# EAGLE board InkTime_2D-PCB (EAGLE 9.7.0)
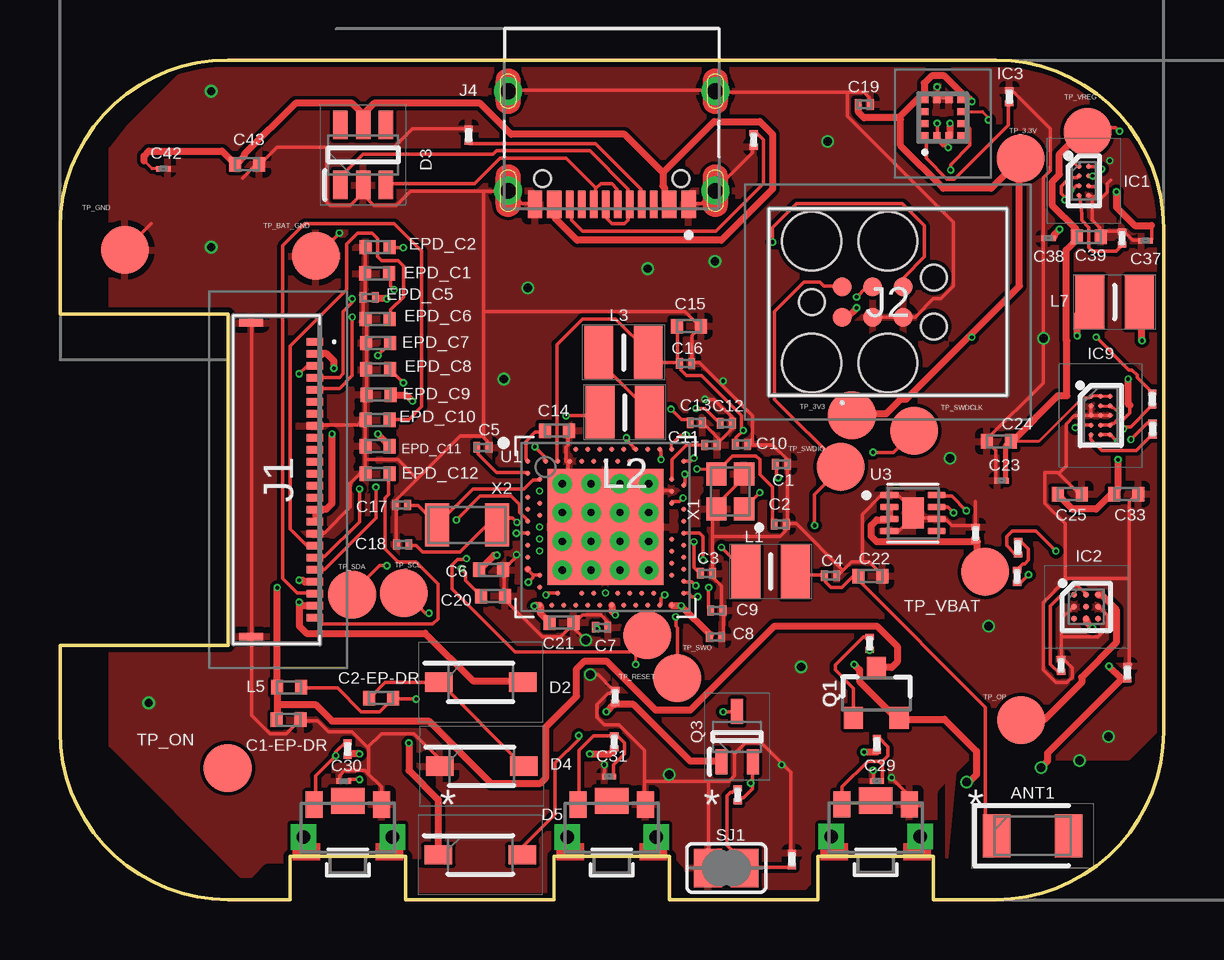
[diagram p0: board, top side]
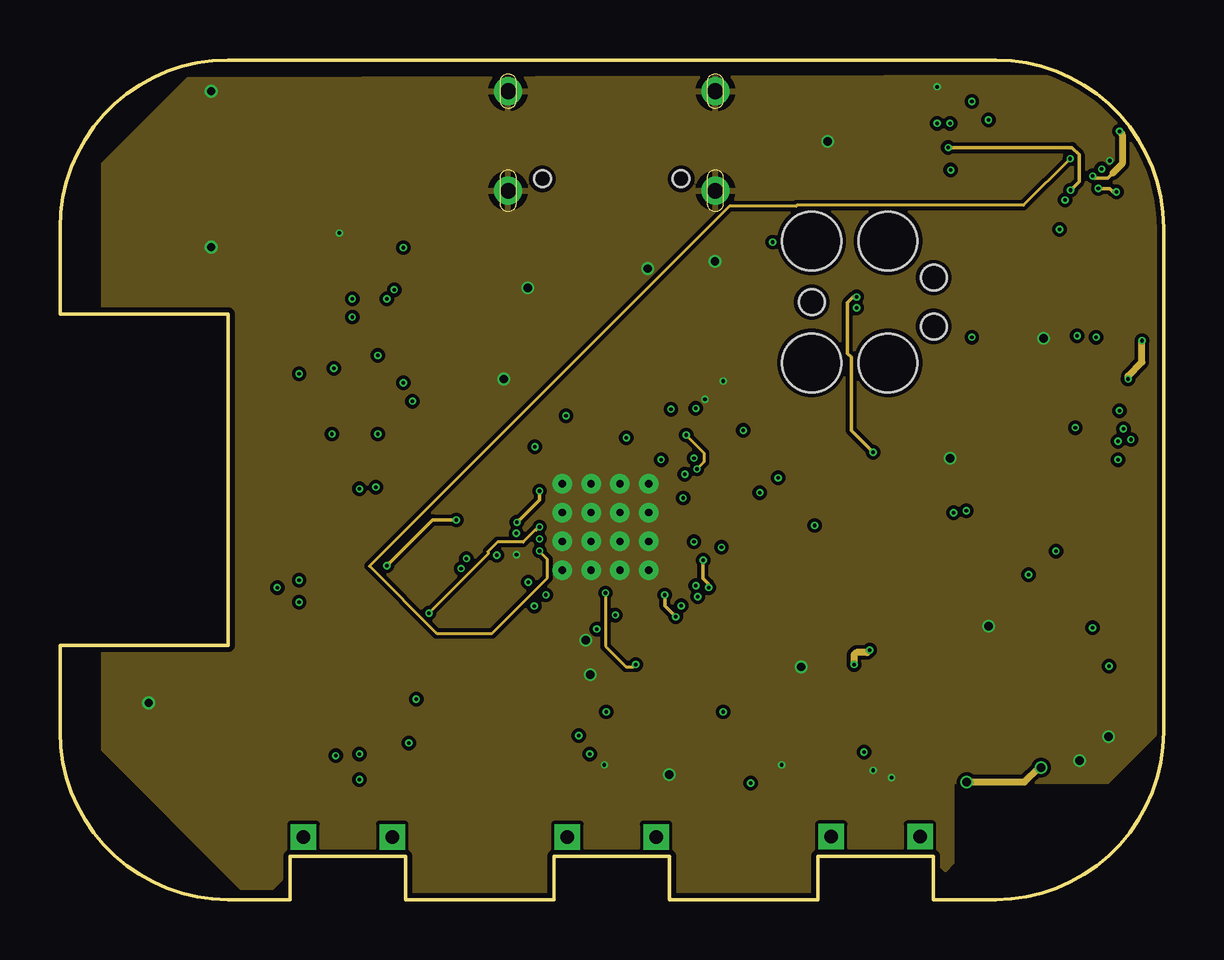
[diagram p1: board, inner layer Route2]
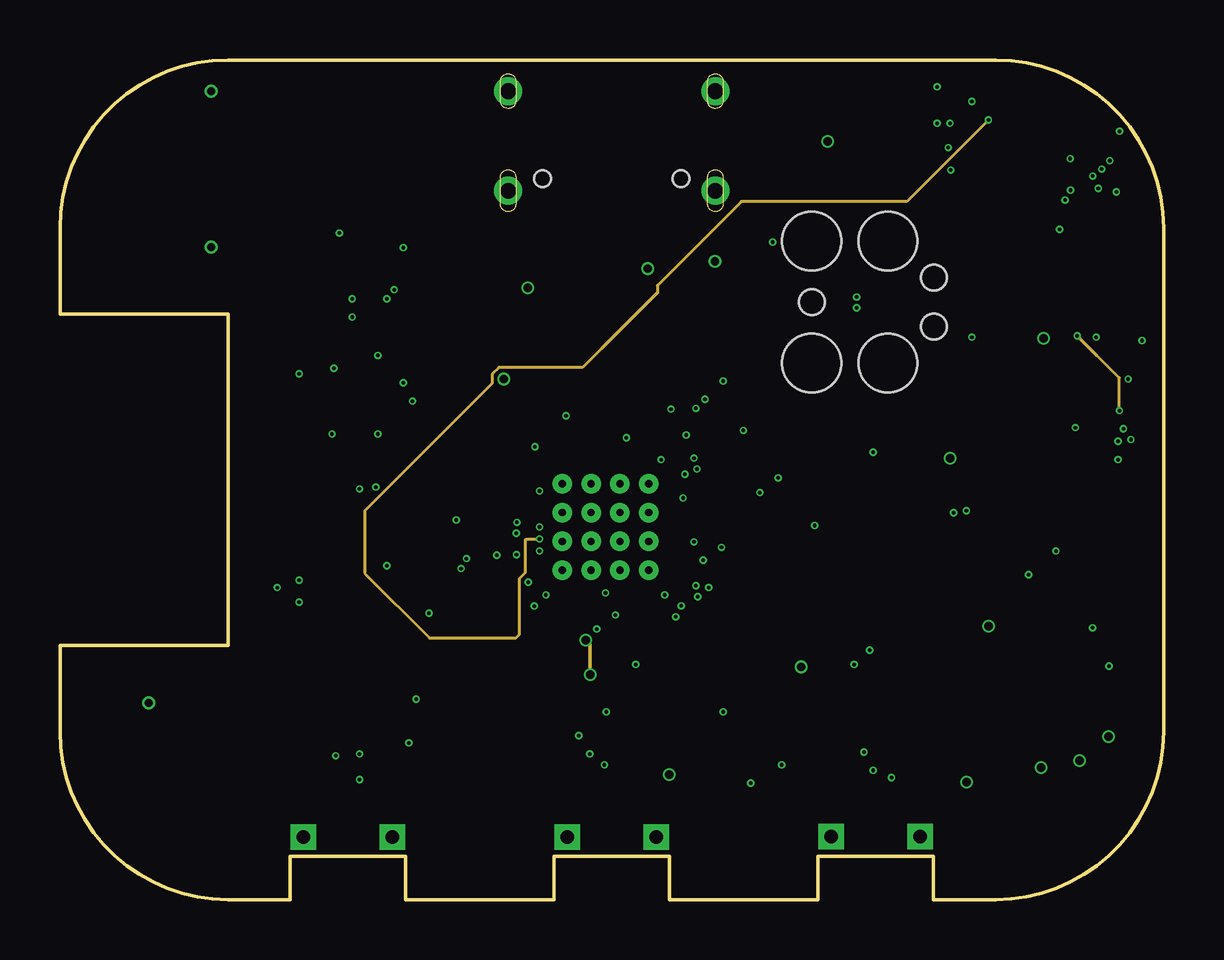
[diagram p2: board, inner layer Route15]
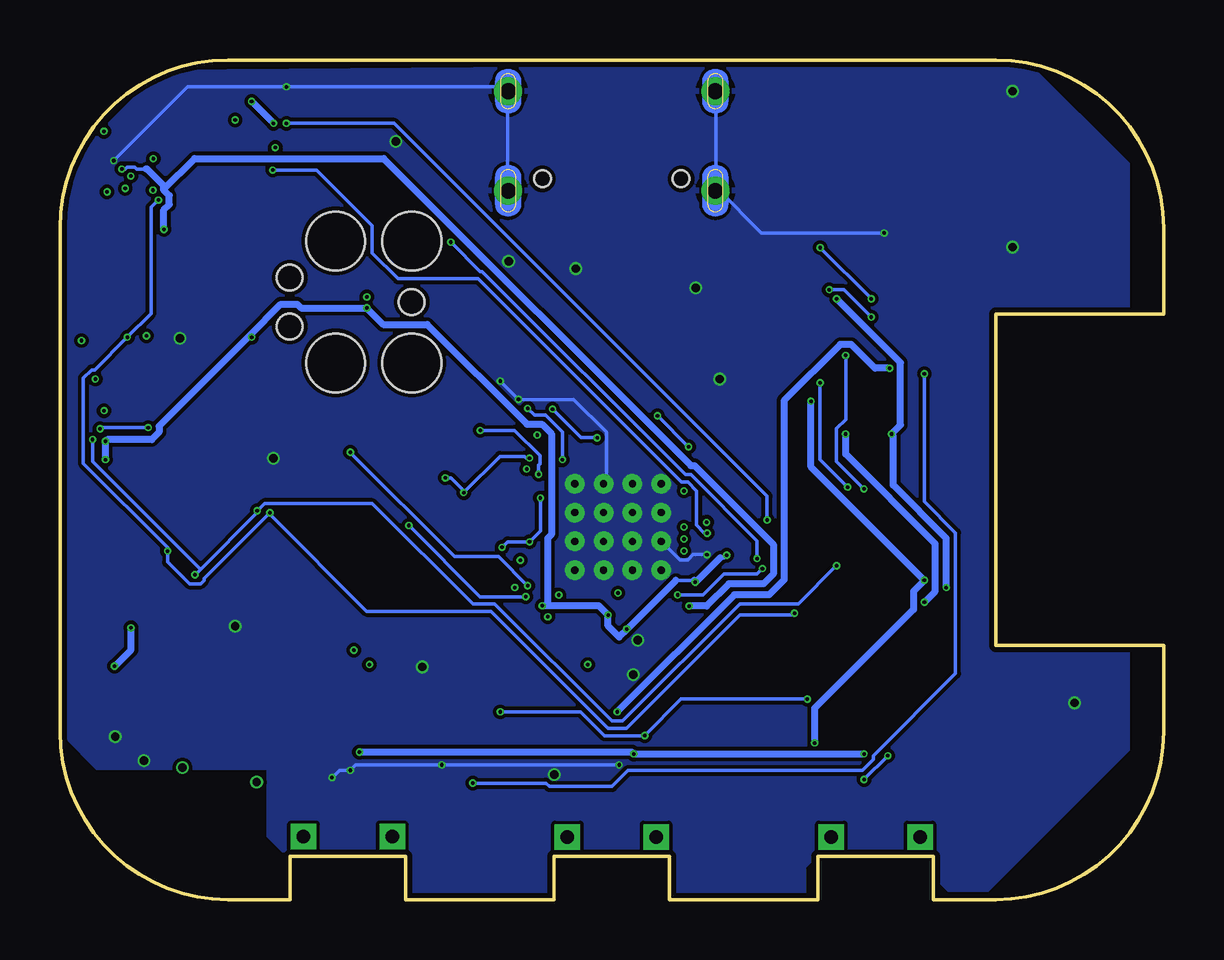
[diagram p3: board, bottom side, seen from below]

Size 46 x 35 mm. Coordinates in mm from the lower left corner, seen from the top.
Outline: 39,35 arc-90 46,28 46,7 arc-90 39,0 36.4,0 36.4,1.8 31.6,1.8 31.6,0 25.4,0 25.4,1.8 20.6,1.8 20.6,0 14.4,0 14.4,1.8 9.6,1.8 9.6,0 7,0 arc-90 0,7 0,10.6 7,10.6 7,24.4 0,24.4 0,28 arc-90 7,35 39,35
Copper layers (1+2*15+16): Top 0.035mm / dielectric 1.5mm / Route2 0.035mm / dielectric 0.15mm / Route15 0.035mm / dielectric 0.2mm / Bottom 0.035mm
Design rules "Fusion Electronics Design Rules *": minimum track width 0.13mm, minimum drill 0.15mm, track to track 0.15mm, track to pad 0.15mm, pad to pad 0.15mm, via to via 0.15mm, smd to smd 0.15mm, copper to edge 0.2mm, drill to drill 6mil, minimum pad ring 10mil, minimum via ring 0.075mm, stop-mask expansion 4mil, vias tented up to drill 9999mil, thermal gap 10mil

## Footprints (pad centres in the part's own frame; a part is rotated, then mirrored left to right if it is on the bottom)
2450AT18B100E_ANTC3216X140N = smd 1.15 x 1.8: 1 -1.5,0; 2 1.5,0
NORDIC_NRF_3_RESC0201_L = smd 0.28 x 0.43: 1 -0.255,0; 2 0.255,0
NORDIC_NRF_3_RESC0402_L = smd 0.5 x 0.6: 1 -0.5,0; 2 0.5,0
GRM011R60J152KE01L_2_CAPC0201X13N = smd 0.22 x 0.23: 1 -0.185,0; 2 0.185,0
GRM011R60J152KE01L_1_0201 = smd 0.35 x 0.25: 1 0,0.275; 2 0,-0.275
ESP32_C6_LIBRARY_5_SOD3716X135N = smd 1.15 x 0.8: 1 -1.75,0; 2 1.75,0
ESP32_C6_LIBRARY_3_SOT95P280X145-6N = smd 1.2 x 0.6: 1 -1.25,0.95; 2 -1.25,0; 3 -1.25,-0.95; 4 1.25,-0.95; 5 1.25,0; 6 1.25,0.95
BQ25180YBGR_BGA8C40P2X4_100X155X50 = smd 0.2 x 0.2: A1 -0.2,0.6; A2 0.2,0.6; B1 -0.2,0.2; B2 0.2,0.2; C1 -0.2,-0.2; C2 0.2,-0.2; D1 -0.2,-0.6; D2 0.2,-0.6
DRV2605YZFR_BGA9C50P3X3_144X144X62 = smd 0.25 x 0.25: A1 -0.5,0.5; A2 0,0.5; A3 0.5,0.5; B1 -0.5,0; B2 0,0; B3 0.5,0; C1 -0.5,-0.5; C2 0,-0.5; C3 0.5,-0.5
BMA423_BMA423 = smd 0.3 x 0.35: 1 -0.75,-0.775; 2 -0.25,-0.775; 3 0.25,-0.775; 4 0.75,-0.775; 7 0.75,0.775; 8 0.25,0.775; 9 -0.25,0.775; 10 -0.75,0.775 | smd 0.35 x 0.3: 5 0.775,-0.25; 6 0.775,0.25; 11 -0.775,0.25; 12 -0.775,-0.25
RT6160AWSC_BGA15C40P3X5_140X230X60 = smd 0.216 x 0.216: A1 -0.4,0.8; A2 0,0.8; A3 0.4,0.8; B1 -0.4,0.4; B2 0,0.4; B3 0.4,0.4; C1 -0.4,0; C2 0,0; C3 0.4,0; D1 -0.4,-0.4; D2 0,-0.4; D3 0.4,-0.4; E1 -0.4,-0.8; E2 0,-0.8; E3 0.4,-0.8
503480-2400_5034802400 = smd 0.3 x 0.7: 1 -5.75,1.525; 2 -5.25,1.525; 3 -4.75,1.525; 4 -4.25,1.525; 5 -3.75,1.525; 6 -3.25,1.525; 7 -2.75,1.525; 8 -2.25,1.525; 9 -1.75,1.525; 10 -1.25,1.525; 11 -0.75,1.525; 12 -0.25,1.525; 13 0.25,1.525; 14 0.75,1.525; 15 1.25,1.525; 16 1.75,1.525; 17 2.25,1.525; 18 2.75,1.525; 19 3.25,1.525; 20 3.75,1.525; 21 4.25,1.525; 22 4.75,1.525; 23 5.25,1.525; 24 5.75,1.525 | smd 0.3 x 1: MP1 -6.54,-1.125; MP2 6.54,-1.125
TC2030-IDC_TC2030IDC = smd 0.783 x 0.783: 1 -0.953,-0.635; 2 -0.953,0.635; 3 0.317,-0.635; 4 0.317,0.635; 5 1.588,-0.635; 6 1.588,0.635 | hole 2.451: -2.223,-2.54; -2.223,2.54; 0.952,-2.54; 0.952,2.54 | hole 1.067: -2.223,0; 2.857,-1.016; 2.857,1.016
KH-TYPE-C-16P_KINGHELM_KH-TYPE-C-16P = smd 0.6 x 1.15: A1_B12 -3.2,4.725; A4_B9 -2.4,4.725; A9_B4 2.4,4.725; A12_B1 3.2,4.725 | smd 0.3 x 1.15: A5 -1.25,4.725; A6 -0.25,4.725; A7 0.25,4.725; A8 1.25,4.725; B5 1.75,4.725; B6 0.75,4.725; B7 -0.75,4.725; B8 -1.75,4.725 | drill 0.65 pad 1.05: SH1 -4.32,0; SH2 4.32,0; SH3 -4.32,4.15; SH4 4.32,4.15 | hole 0.7: -2.89,3.65; 2.89,3.65
MLP2016SR47MT0S1_INDC2016X100N = smd 1.2 x 2.2: 1 -1.028,0; 2 1.028,0
NORDIC_NRF_2_RESC0402_L = smd 0.5 x 0.6: 1 -0.5,0; 2 0.5,0
ESP32_C6_LIBRARY_4_ESP32_C6_LIBRARY_4_ESP32_C6_LIBRARY_4_ESP32_C6_LIBRARY_4_ESP32_WROVER_SPARKFUN-DISCRETESEMI_SOT23-3 = smd 0.8 x 0.9: 1 -0.95,-1; 2 0.95,-1; 3 0,1.1
ESP32_C6_LIBRARY_6_SOT65P210X110-3N = smd 1.05 x 0.5: 1 -1.05,0.65; 2 -1.05,-0.65; 3 1.05,0
CPF0201D7K68C1_0201 = smd 0.35 x 0.25: 1 0,0.275; 2 0,-0.275
ESP32_C6_LIBRARY_7_JUMPER_SJ = smd 1.168 x 1.6: 1 -0.762,0; 2 0.762,0
2025-10-22_07-23-44_LIBRARY_SW_EVP-AKE31A_PAN = smd 0.711 x 1.092: 1 -1.4,-0.972; 2 1.4,-0.972 | drill 0.559 pad 0.914 square: 3 -1.848,0.381; 4 1.848,0.381 | smd 1.397 x 1.092: 5 0,-1.124
HECTOR_WATCH_1_TP20R = smd 2 x 2: TP 0,0
NORDIC_NRF_4_AQFN50P700X700X85_HS-74N = smd 4.85 x 4.85: P$74 0,0 | drill 0.3 pad 0.6: P$75 -1.8,1.8; P$76 -0.6,1.8; P$77 0.6,1.8; P$78 1.8,1.8; P$79 -1.8,0.6; P$80 -0.6,0.6; P$81 0.6,0.6; P$82 1.8,0.6; P$83 -1.8,-0.6; P$84 -0.6,-0.6; P$85 0.6,-0.6; P$86 1.8,-0.6; P$87 -1.8,-1.8; P$88 -0.6,-1.8; P$89 0.6,-1.8; P$90 1.8,-1.8 | smd 0.2 x 0.2: P$A8 -1.25,3.25; P$A10 -0.75,3.25; P$A12 -0.25,3.25; P$A14 0.25,3.25; P$A16 0.75,3.25; P$A18 1.25,3.25; P$A20 1.75,3.25; P$A22 2.25,3.25; P$A23 2.75,3.25; P$AA24 3.25,-2.25; P$AB2 -2.75,-2.5; P$AC5 -2,-2.75; P$AC9 -1,-2.75; P$AC11 -0.5,-2.75; P$AC13 0,-2.75; P$AC15 0.5,-2.75; P$AC17 1,-2.75; P$AC19 1.5,-2.75; P$AC21 2,-2.75; P$AC24 3.25,-2.75; P$AD2 -2.75,-3.25; P$AD4 -2.25,-3.25; P$AD6 -1.75,-3.25; P$AD8 -1.25,-3.25; P$AD10 -0.75,-3.25; P$AD12 -0.25,-3.25; P$AD14 0.25,-3.25; P$AD16 0.75,-3.25; P$AD18 1.25,-3.25; P$AD20 1.75,-3.25; P$AD22 2.25,-3.25; P$AD23 2.75,-3.25; P$B1 -3.25,2.75; P$B3 -2.5,2.75; P$B5 -2,2.75; P$B7 -1.5,2.75; P$B9 -1,2.75; P$B11 -0.5,2.75; P$B13 0,2.75; P$B15 0.5,2.75; P$B17 1,2.75; P$B19 1.5,2.75; P$B24 3.25,2.75; P$C1 -3.25,2.25; P$D2 -2.75,2; P$D23 2.75,2; P$E24 3.25,1.75; P$F2 -2.75,1.5; P$F23 2.75,1.5; P$G1 -3.25,1.25; P$H2 -2.75,1; P$H23 2.75,1; P$J1 -3.25,0.75; P$J24 3.25,0.75; P$K2 -2.75,0.5; P$L1 -3.25,0.25; P$L24 3.25,0.25; P$M2 -2.75,0; P$N1 -3.25,-0.25; P$N24 3.25,-0.25; P$P2 -2.75,-0.5; P$P23 2.75,-0.5; P$R1 -3.25,-0.75; P$R24 3.25,-0.75; P$T2 -2.75,-1; P$T23 2.75,-1; P$U1 -3.25,-1.25; P$U24 3.25,-1.25; P$V23 2.75,-1.5; P$W1 -3.25,-1.75; P$W24 3.25,-1.75; P$Y2 -2.75,-2; P$Y23 2.75,-2
ESP32_C6_LIBRARY_SON50P200X200X80-9N = smd 0.76 x 0.27: 1 -0.985,0.75; 2 -0.985,0.25; 3 -0.985,-0.25; 4 -0.985,-0.75; 5 0.985,-0.75; 6 0.985,-0.25; 7 0.985,0.25; 8 0.985,0.75 | smd 0.9 x 1.3: 9 0,0
NORDIC_NRF_BT-XTAL_2016_N = smd 0.95 x 0.85: 1 -0.725,-0.575; 2 0.725,-0.575; 3 0.725,0.575; 4 -0.725,0.575
NORDIC_NRF_1_XTAL_3215_N = smd 1 x 1.8: 1 -1.25,0; 2 1.25,0

## Placement (x,y rotation side)
ANT1  2450AT18B100E  [2450AT18B100E_ANTC3216X140N]  40.54,2.66 0 top
C1  12pF  [NORDIC_NRF_3_RESC0201_L]  30.08,18.15 0 top
C1-EP-DR  10uF  [NORDIC_NRF_3_RESC0402_L]  9.54,7.5 0 top
C2  12pF  [NORDIC_NRF_3_RESC0201_L]  30.03,15.65 0 top
C2-EP-DR  4.7uF/25V  [NORDIC_NRF_3_RESC0402_L]  13.38,8.4 0 top
C3  1pF  [NORDIC_NRF_3_RESC0201_L]  26.95,13.6 0 top
C4  1pF  [NORDIC_NRF_3_RESC0201_L]  32.12,13.5 0 top
C5  100nF  [NORDIC_NRF_3_RESC0201_L]  17.63,18.85 0 top
C6  4.7uF  [NORDIC_NRF_3_RESC0402_L]  17.96,13.75 0 top
C7  100nF  [NORDIC_NRF_3_RESC0201_L]  22.58,11.35 0 top
C8  100nF  [NORDIC_NRF_3_RESC0201_L]  27.33,10.95 0 top
C9  820pF  [NORDIC_NRF_3_RESC0201_L]  27.38,12.05 0 top
C10  N.C  [NORDIC_NRF_3_RESC0201_L]  28.41,18.98 0 top
C11  100pF  [NORDIC_NRF_3_RESC0201_L]  27.13,18.95 0 top
C12  100nF  [NORDIC_NRF_3_RESC0201_L]  27.78,19.85 0 top
C13  N.C  [NORDIC_NRF_3_RESC0201_L]  26.53,19.88 0 top
C14  4.7uF  [NORDIC_NRF_3_RESC0402_L]  20.71,19.55 0 top
C15  1uF  [NORDIC_NRF_3_RESC0402_L]  26.21,23.9 0 top
C16  47nF  [NORDIC_NRF_3_RESC0201_L]  26.08,22.35 0 top
C17  12pF  [NORDIC_NRF_3_RESC0201_L]  14.23,16.45 0 top
C18  12pF  [NORDIC_NRF_3_RESC0201_L]  14.29,14.8 0 top
C19  100nF  [NORDIC_NRF_3_RESC0201_L]  33.53,33.15 0 top
C20  4.7uF  [NORDIC_NRF_3_RESC0402_L]  18.06,12.65 0 top
C21  4.7uF  [NORDIC_NRF_3_RESC0402_L]  20.91,11.55 0 top
C22  N.C  [NORDIC_NRF_3_RESC0402_L]  33.78,13.48 0 top
C23  0.1uF  [GRM011R60J152KE01L_2_CAPC0201X13N]  39.25,17.46 0 top
C24  10uF  [NORDIC_NRF_3_RESC0402_L]  39.14,19.1 0 top
C25  22uF  [NORDIC_NRF_3_RESC0402_L]  42.09,16.9 0 top
C27  0.1uF  [GRM011R60J152KE01L_1_0201]  38.17,15.26 0 top
C29  1uF  [GRM011R60J152KE01L_2_CAPC0201X13N]  34.06,4.94 0 top
C30  1uF  [GRM011R60J152KE01L_2_CAPC0201X13N]  11.83,4.93 0 top
C31  1uF  [GRM011R60J152KE01L_2_CAPC0201X13N]  22.89,5.13 0 top
C32  1uF  [GRM011R60J152KE01L_1_0201]  41.73,9.76 0 top
C33  22uF  [NORDIC_NRF_3_RESC0402_L]  44.44,16.9 0 top
C34  0.1uF  [GRM011R60J152KE01L_1_0201]  44.49,9.46 0 top
C37  1uF  [GRM011R60J152KE01L_2_CAPC0201X13N]  45.25,27.46 0 top
C38  1uF  [GRM011R60J152KE01L_2_CAPC0201X13N]  41.21,27.56 0 top
C39  10uF  [NORDIC_NRF_3_RESC0402_L]  42.89,27.62 0 top
C42  0.1uF  [GRM011R60J152KE01L_2_CAPC0201X13N]  4.31,30.46 0 top
C43  4.7uF\  [NORDIC_NRF_3_RESC0402_L]  7.81,30.65 0 top
D2  MBR0530  [ESP32_C6_LIBRARY_5_SOD3716X135N]  17.54,9.06 0 top
D3  USBLC6-2SC6Y  [ESP32_C6_LIBRARY_3_SOT95P280X145-6N]  12.64,31.04 90 top
D4  MBR0530  [ESP32_C6_LIBRARY_5_SOD3716X135N]  17.58,5.56 0 top
D5  MBR0530  [ESP32_C6_LIBRARY_5_SOD3716X135N]  17.52,1.86 0 top
EPD_C1  1uF/50V  [NORDIC_NRF_3_RESC0402_L]  13.22,26.1 0 top
EPD_C2  1uF/50V  [NORDIC_NRF_3_RESC0402_L]  13.23,27.2 0 top
EPD_C5  0.1uF/50V  [NORDIC_NRF_3_RESC0201_L]  12.89,25.1 0 top
EPD_C6  1uF/50V  [NORDIC_NRF_3_RESC0402_L]  13.24,24.2 0 top
EPD_C7  1uF/50V  [NORDIC_NRF_3_RESC0402_L]  13.25,23.2 0 top
EPD_C8  1uF/50V  [NORDIC_NRF_3_RESC0402_L]  13.26,22.1 0 top
EPD_C9  1uF/50V  [NORDIC_NRF_3_RESC0402_L]  13.28,21.05 0 top
EPD_C10  1uF/50V  [NORDIC_NRF_3_RESC0402_L]  13.23,20 0 top
EPD_C11  1uF/50V  [NORDIC_NRF_3_RESC0402_L]  13.23,18.9 0 top
EPD_C12  1uF/50V  [NORDIC_NRF_3_RESC0402_L]  13.23,17.75 0 top
IC1  BQ25180YBGR  [BQ25180YBGR_BGA8C40P2X4_100X155X50]  42.68,29.96 0 top
IC2  DRV2605YZFR  [DRV2605YZFR_BGA9C50P3X3_144X144X62]  42.78,12.2 0 top
IC3  BMA421  [BMA423_BMA423]  36.8,32.6 0 top
IC9  RT6160AWSC  [RT6160AWSC_BGA15C40P3X5_140X230X60]  43.38,20.18 0 top
J1  503480-2400  [503480-2400_5034802400]  9.1,17.5 270 top
J2  TC2030-IDC  [TC2030-IDC_TC2030IDC]  33.56,24.91 0 top
J4  KH-TYPE-C-16P  [KH-TYPE-C-16P_KINGHELM_KH-TYPE-C-16P]  23,33.7 180 top
L1  3.9nH  [MLP2016SR47MT0S1_INDC2016X100N]  29.62,13.68 0 top
L2  10uH  [MLP2016SR47MT0S1_INDC2016X100N]  23.54,20.31 0 top
L3  15nH  [MLP2016SR47MT0S1_INDC2016X100N]  23.49,22.81 0 top
L5  68uH  [NORDIC_NRF_2_RESC0402_L]  9.56,8.85 0 top
L7  FTC252012SR47MBCA  [MLP2016SR47MT0S1_INDC2016X100N]  43.96,24.91 0 top
Q1  20V/4.2A/52mΩ/1.4W  [ESP32_C6_LIBRARY_4_ESP32_C6_LIBRARY_4_ESP32_C6_LIBRARY_4_ESP32_C6_LIBRARY_4_ESP32_WROVER_SPARKFUN-DISCRETESEMI_SOT23-3]  34.03,8.57 0 top
Q3  SI1308EDL-T1-GE3  [ESP32_C6_LIBRARY_6_SOT65P210X110-3N]  28.23,6.79 90 top
R1_EP_DR  0.47  [CPF0201D7K68C1_0201]  28.25,4.36 0 top
R1_USB  5K1  [CPF0201D7K68C1_0201]  17.03,31.87 0 top
R2  0  [CPF0201D7K68C1_0201]  45.55,19.62 0 top
R2_EP_DR  10K  [CPF0201D7K68C1_0201]  23.15,8.47 0 top
R2_USB  5K1  [CPF0201D7K68C1_0201]  28.91,31.67 0 top
R3  0  [CPF0201D7K68C1_0201]  39.57,33.47 0 top
R4  0  [CPF0201D7K68C1_0201]  45.53,20.87 0 top
R5  10K  [CPF0201D7K68C1_0201]  11.99,6.27 0 top
R7  10K  [CPF0201D7K68C1_0201]  34.05,6.47 0 top
R8  10K  [CPF0201D7K68C1_0201]  23.11,6.57 0 top
R9  10K  [CPF0201D7K68C1_0201]  44.27,27.57 0 top
R17  3K3  [CPF0201D7K68C1_0201]  39.93,14.67 0 top
R18  3K3\  [CPF0201D7K68C1_0201]  39.89,13.47 0 top
R_PWR_EPD  10K  [CPF0201D7K68C1_0201]  33.75,10.67 0 top
R_TYPE_SEL  2.2  [CPF0201D7K68C1_0201]  30.51,1.67 0 top
SJ1  0  [ESP32_C6_LIBRARY_7_JUMPER_SJ]  27.78,1.31 0 top
SW_DN  2025-10-22_07-23-44_LIBRARY_EVP-AKE31ASW_EVP-AKE31A_PAN  [2025-10-22_07-23-44_LIBRARY_SW_EVP-AKE31A_PAN]  34,3 180 top
SW_ENT  2025-10-22_07-23-44_LIBRARY_EVP-AKE31ASW_EVP-AKE31A_PAN  [2025-10-22_07-23-44_LIBRARY_SW_EVP-AKE31A_PAN]  23,2.99 180 top
SW_UP  2025-10-22_07-23-44_LIBRARY_EVP-AKE31ASW_EVP-AKE31A_PAN  [2025-10-22_07-23-44_LIBRARY_SW_EVP-AKE31A_PAN]  12,2.99 180 top
TP_3.3V  HECTOR_WATCH_1_TPTP20R  [HECTOR_WATCH_1_TP20R]  40.05,30.89 0 top
TP_3V3  HECTOR_WATCH_1_TPTP20R  [HECTOR_WATCH_1_TP20R]  33.01,20.18 0 top
TP_BAT_GND  HECTOR_WATCH_1_TPTP20R  [HECTOR_WATCH_1_TP20R]  10.66,26.83 0 top
TP_GND  HECTOR_WATCH_1_TPTP20R  [HECTOR_WATCH_1_TP20R]  2.7,27.08 0 top
TP_ON  HECTOR_WATCH_1_TPTP20R  [HECTOR_WATCH_1_TP20R]  6.99,5.48 0 top
TP_OP  HECTOR_WATCH_1_TPTP20R  [HECTOR_WATCH_1_TP20R]  40.07,7.48 0 top
TP_RESET  HECTOR_WATCH_1_TPTP20R  [HECTOR_WATCH_1_TP20R]  24.48,11.03 0 top
TP_SCL  HECTOR_WATCH_1_TPTP20R  [HECTOR_WATCH_1_TP20R]  14.33,12.78 0 top
TP_SDA  HECTOR_WATCH_1_TPTP20R  [HECTOR_WATCH_1_TP20R]  12.18,12.71 0 top
TP_SWDCLK  HECTOR_WATCH_1_TPTP20R  [HECTOR_WATCH_1_TP20R]  35.59,19.55 0 top
TP_SWDIO  HECTOR_WATCH_1_TPTP20R  [HECTOR_WATCH_1_TP20R]  32.54,18.03 0 top
TP_SWO  HECTOR_WATCH_1_TPTP20R  [HECTOR_WATCH_1_TP20R]  25.73,9.24 0 top
TP_VBAT  HECTOR_WATCH_1_TPTP20R  [HECTOR_WATCH_1_TP20R]  38.56,13.66 0 top
TP_VREG  HECTOR_WATCH_1_TPTP20R  [HECTOR_WATCH_1_TP20R]  42.84,32 0 top
U1  NRF52840 _QF  [NORDIC_NRF_4_AQFN50P700X700X85_HS-74N]  22.74,15.53 0 top
U3  MAX17048G+T10  [ESP32_C6_LIBRARY_SON50P200X200X80-9N]  35.56,16.11 0 top
X1  32MHz  [NORDIC_NRF_BT-XTAL_2016_N]  27.94,17.01 90 top
X2  32.768KHz  [NORDIC_NRF_1_XTAL_3215_N]  16.97,15.61 0 top

## Library data of the parts
ANT1 = InkTime_v5; ARROW_PART_NUMBER: 2450AT18B100E; ARROW_PRICE-STOCK: https://www.arrow.com/en/products/2450at18b100e/johanson-dielectrics?utm_currency=USD&region=nac; DESCRIPTION: Antennas 2.45GHz ANTENNA; HEIGHT: 1.4mm; MANUFACTURER_NAME: JOHANSON TECHNOLOGY; MANUFACTURER_PART_NUMBER: 2450AT18B100E; MOUSER_PART_NUMBER: 609-2450AT18B100E; MOUSER_PRICE-STOCK: https://www.mouser.co.uk/ProductDetail/Johanson-Technology/2450AT18B100E?qs=yCnrNFeXz%252Bh5MFsFIXGZGA%3D%3D
C1 C1-EP-DR C2 C2-EP-DR C3-C22 C24 C25 C27 C32-C34 C39 C43 EPD_C1 EPD_C2 EPD_C5-EPD_C12 L5 R1_EP_DR R1_USB R2 R2_EP_DR R2_USB R3-R5 R7-R9 R17 R18 R_PWR_EPD R_TYPE_SEL SJ1 TP_3.3V TP_3V3 TP_BAT_GND TP_GND TP_ON TP_OP TP_RESET TP_SCL TP_SDA TP_SWDCLK TP_SWDIO TP_SWO TP_VBAT TP_VREG X1 X2 = InkTime_v5
C23 C29-C31 C37 C38 C42 = InkTime_v5; AVAILABILITY: In Stock; CHECK_PRICES: https://www.snapeda.com/parts/GRM011R60J152KE01L/Murata/view-part/?ref=eda; DESCRIPTION: SMD Capacitor X5R(EIA) with Capacitance: 1500pF Tol. 10%. Rated Voltage: 6.3Vdc; MF: Murata; MP: GRM011R60J152KE01L; PACKAGE: 0201 Murata; PRICE: None; SNAPEDA_LINK: https://www.snapeda.com/parts/GRM011R60J152KE01L/Murata/view-part/?ref=snap
D2 D4 D5 = InkTime_v5; AVAILABILITY: In Stock; CHECK_PRICES: https://www.snapeda.com/parts/MBR0530/Onsemi/view-part/?ref=eda; DESCRIPTION: Diode Schottky 30 V 500mA Surface Mount SOD-123; MF: ON Semiconductor; MP: MBR0530; PACKAGE: SOD-123-2 ON Semiconductor; PRICE: None; PURCHASE-URL: https://www.snapeda.com/api/url_track_click_mouser/?unipart_id=179458&manufacturer=ON Semiconductor&part_name=MBR0530&search_term=None; SNAPEDA_LINK: https://www.snapeda.com/parts/MBR0530/Onsemi/view-part/?ref=snap
D3 = InkTime_v5; AVAILABILITY: In Stock; CHECK_PRICES: https://www.snapeda.com/parts/USBLC6-2SC6Y/STMicroelectronics/view-part/?ref=eda; DESCRIPTION: 17V Clamp 5A (8/20µs) Ipp Tvs Diode Surface Mount SOT-23-6; MF: STMicroelectronics; MP: USBLC6-2SC6Y; PACKAGE: SOT-23-6 STMicroelectronics; PRICE: None; SNAPEDA_LINK: https://www.snapeda.com/parts/USBLC6-2SC6Y/STMicroelectronics/view-part/?ref=snap
IC1 = InkTime_v5; ARROW_PART_NUMBER: BQ25180YBGR; ARROW_PRICE-STOCK: https://www.arrow.com/en/products/bq25180ybgr/texas-instruments?utm_currency=USD&region=nac; DESCRIPTION: Charger IC Lithium Ion/Polymer, Lithium Iron Phosphate 8-DSBGA (1.6x1.1); HEIGHT: 0.5mm; MANUFACTURER_NAME: Texas Instruments; MANUFACTURER_PART_NUMBER: BQ25180YBGR; MOUSER_PART_NUMBER: 595-BQ25180YBGR; MOUSER_PRICE-STOCK: https://www.mouser.co.uk/ProductDetail/Texas-Instruments/BQ25180YBGR?qs=doiCPypUmgEWjAK%252BJAX6Tw%3D%3D
IC2 = InkTime_v5; ARROW_PART_NUMBER: DRV2605YZFR; ARROW_PRICE-STOCK: https://www.arrow.com/en/products/drv2605yzfr/texas-instruments?region=nac; DESCRIPTION: Haptic Driver for ERM/LRA with Built-In Library and Smart Loop Architecture; HEIGHT: 0.625mm; MANUFACTURER_NAME: Texas Instruments; MANUFACTURER_PART_NUMBER: DRV2605YZFR
IC3 = InkTime_v5; ARROW_PART_NUMBER: BMA423; ARROW_PRICE-STOCK: https://www.arrow.com/en/products/bma423/bosch; DESCRIPTION: Accelerometers Triaxial low-g 12bit Acceleration Sensor; HEIGHT: 1mm; MANUFACTURER_NAME: BOSCH; MANUFACTURER_PART_NUMBER: BMA423; MOUSER_PART_NUMBER: 262-BMA423; MOUSER_PRICE-STOCK: https://www.mouser.co.uk/ProductDetail/Bosch-Sensortec/BMA423?qs=HXFqYaX1Q2xC%252BSgeGoX3mg%3D%3D
IC9 = InkTime_v5; DESCRIPTION: Buck-Boost Regulator Positive Output Step-Up/Step-Down I2C DC-DC Controller IC 15-WL-CSP (BSC) (1.4x2.3); HEIGHT: 0.6mm; MANUFACTURER_NAME: RICHTEK; MANUFACTURER_PART_NUMBER: RT6160AWSC; MOUSER_PART_NUMBER: 835-RT6160AWSC; MOUSER_PRICE-STOCK: https://www.mouser.co.uk/ProductDetail/Richtek/RT6160AWSC?qs=amGC7iS6iy%2FLd9PSoixZXQ%3D%3D
J1 = InkTime_v5; DESCRIPTION: FFC & FPC Connectors 0.5mm FPC RA SMT Dual Contact 24Ckt; HEIGHT: 1.87mm; MANUFACTURER_NAME: Molex; MANUFACTURER_PART_NUMBER: 503480-2400; MOUSER_PART_NUMBER: 538-503480-2400; MOUSER_PRICE-STOCK: https://www.mouser.co.uk/ProductDetail/Molex/503480-2400?qs=OAhjpuo3Vu7efIoxFh9AOw%3D%3D
J2 = InkTime_v5; DESCRIPTION: CABLE ADAPTER 6 POS; HEIGHT: 19mm; MANUFACTURER_NAME: Tag Connect; MANUFACTURER_PART_NUMBER: TC2030-IDC
J4 = InkTime_v5; AVAILABILITY: Not in stock; CHECK_PRICES: https://www.snapeda.com/parts/KH-TYPE-C-16P/Kinghelm/view-part/?ref=eda; MF: kinghelm; MP: KH-TYPE-C-16P; PACKAGE: None; PRICE: None; SNAPEDA_LINK: https://www.snapeda.com/parts/KH-TYPE-C-16P/Kinghelm/view-part/?ref=snap
L1-L3 L7 = InkTime_v5; DESCRIPTION: SMD / SMT Inductors (Coils), L=0.47?H, L x W x T :; HEIGHT: 1mm; JLCPCB: https://jlcpcb.com/partdetail/6763488-FTC252012SR47MBCA/C5832368; MANUFACTURER_NAME: TDK; MANUFACTURER_PART_NUMBER: FTC252012SR47MBCA
Q1 = InkTime_v5; PROD_ID: TRAN-14388
Q3 = InkTime_v5; AVAILABILITY: In Stock; CHECK_PRICES: https://www.snapeda.com/parts/SI1308EDL-T1-GE3/Vishay+Siliconix/view-part/?ref=eda; DESCRIPTION: Si1308EDL-T1-GE3 N-channel MOSFET Transistor, 1.5 A, 30 V, 3-Pin SC-70 | Siliconix / Vishay SI1308EDL-T1-GE3; MF: Vishay Siliconix; MP: SI1308EDL-T1-GE3; PACKAGE: SOT-323 Vishay Semiconductor; PRICE: None; PURCHASE-URL: https://www.snapeda.com/api/url_track_click_mouser/?unipart_id=274603&manufacturer=Vishay Siliconix&part_name=SI1308EDL-T1-GE3&search_term=None; SNAPEDA_LINK: https://www.snapeda.com/parts/SI1308EDL-T1-GE3/Vishay+Siliconix/view-part/?ref=snap
SW_DN SW_ENT SW_UP = InkTime_v5; COPYRIGHT: Copyright (C) 2025 Ultra Librarian. All rights reserved.; DIGI-KEY_PART_NUMBER_1: P123437TR-ND; DIGI-KEY_PART_NUMBER_2: P123437CT-ND; DIGI-KEY_PART_NUMBER_3: P123437DKR-ND; MANUFACTURER_NAME: Panasonic; MANUFACTURER_PART_NUMBER: EVP-AKE31A
U1 = InkTime_v5; U1: NRF52840 _QF
U3 = InkTime_v5; AVAILABILITY: In Stock; CHECK_PRICES: https://www.snapeda.com/parts/MAX17048G+T10/Analog+Devices/view-part/?ref=eda; DESCRIPTION: 3µA 1-Cell/2-Cell Fuel Gauge with ModelGauge; MF: Analog Devices; MP: MAX17048G+T10; PACKAGE: TDFN-8 Maxim; PRICE: None; PURCHASE-URL: https://www.snapeda.com/api/url_track_click_mouser/?unipart_id=329239&manufacturer=Analog Devices&part_name=MAX17048G+T10&search_term=None; SNAPEDA_LINK: https://www.snapeda.com/parts/MAX17048G+T10/Analog+Devices/view-part/?ref=snap

## Nets
3V3/1.7D [POWER]: C34.2 IC2.C2 Q1.2 R_PWR_EPD.2
3V3/1.7D1 [POWER]: R5.2 R7.2 R8.2
3V3/2.4A [POWER]: C6.1 C7.1 C8.1 C19.1 C25.1 C33.1 IC3.3 IC3.7 IC3.10 IC9.E2 IC9.E3 J2.1 TP_3.3V.TP TP_3V3.TP U1.P$AD14 U1.P$AD23 U1.P$W1 U1.P$Y2
ALERT/1.6C: U3.5
ALERT/2.5C: U1.P$J24
D+/1.5D: D3.4
D+/2.7D: U1.P$AD6
D-/1.5D: D3.6
D-/2.7D: U1.P$AD4
DEC1: C5.1 U1.P$C1
DEC4_6: C10.1 C15.1 C16.1 L3.2 U1.P$B5 U1.P$E24
DN: D3.1 J4.A7 J4.B7
DP: D3.3 J4.A6 J4.B6
EPD_3V3 [POWER]: C1-EP-DR.1 EPD_C5.2 J1.15 J1.16 L5.1 Q1.3
EPD_BUSY/1.5D: J1.9
EPD_BUSY/2.2D: U1.P$AD12
EPD_CS/1.4C: J1.12
EPD_CS/2.2D: U1.P$K2
EPD_DC/1.5D: J1.11
EPD_DC/2.2D: U1.P$AD10
EPD_RST/1.5D: J1.10
EPD_RST/2.2D: U1.P$AC11
GDR [POWER]: J1.2 Q3.1 R2_EP_DR.2
GND: C1-EP-DR.2 C1.2 C2.2 C3.2 C4.2 C5.2 C6.2 C7.2 C8.2 C9.2 C10.2 C11.2 C12.2 C13.2 C14.2 C15.2 C16.2 C17.1 C18.1 C19.2 C20.2 C21.2 C22.2 C23.1 C24.1 C25.2 C27.1 C29.1 C30.1 C31.1 C32.1 C33.2 C34.1 C37.1 C38.1 C39.2 C42.2 C43.2 D3.2 D4.1 EPD_C1.1 EPD_C2.1 EPD_C5.1 EPD_C6.1 EPD_C7.1 EPD_C8.1 EPD_C9.1 EPD_C10.1 EPD_C11.1 EPD_C12.1 IC1.D2 IC2.B1 IC2.B3 IC3.8 IC3.9 IC9.B1 IC9.C1 IC9.C2 IC9.C3 J1.8 J1.17 J1.MP1 J1.MP2 J2.3 J2.5 J4.A1_B12 J4.A12_B1 J4.SH1 J4.SH2 J4.SH3 J4.SH4 R1_USB.1 R2_EP_DR.1 R2_USB.2 R3.1 R9.1 R_TYPE_SEL.1 SJ1.1 SW_DN.1 SW_ENT.1 SW_UP.1 TP_BAT_GND.TP TP_GND.TP U1.P$74 U1.P$75 U1.P$76 U1.P$77 U1.P$78 U1.P$79 U1.P$80 U1.P$81 U1.P$82 U1.P$83 U1.P$84 U1.P$85 U1.P$86 U1.P$87 U1.P$88 U1.P$89 U1.P$90 U1.P$B7 U1.P$F23 U3.1 U3.4 U3.6 U3.9 X1.2 X1.4
HAPTIC_EN/1.4C: IC2.A1
HAPTIC_EN/2.6A: U1.P$U1
IMU_INT1: IC3.5 U1.P$N1
IMU_INT2: IC3.6 U1.P$P2
LX1 [POWER]: IC9.B2 IC9.B3 L7.1
LX2 [POWER]: IC9.D2 IC9.D3 L7.2
MOSI/1.5B: J1.14
MOSI/2.2D: U1.P$B13
N$1: C11.1 U1.P$D23
N$2: C3.1 L1.1 U1.P$H23
N$4: C1.1 U1.P$B24 X1.1
N$5: C2.1 U1.P$A23 X1.3
N$6: C20.1 U1.P$AC5
N$8: C9.1 U1.P$N24
N$9: C14.1 U1.P$B1
N$10: L2.1 U1.P$B3
N$11: U1.P$AD18
N$12: L2.2 L3.1
N$13: C13.1 U1.P$A18
N$14: C12.1 U1.P$A22
N$15: IC3.1 R3.2
N$16: IC9.D1 R4.2
N$17: IC9.E1 R2.2
N$18: R17.1 R18.1
N$19: IC1.D1 R9.2
N$20: C2-EP-DR.2 D5.2 L5.2 Q3.3
N$21: C2-EP-DR.1 D2.1 D4.2
N$22: R1_EP_DR.1 R_TYPE_SEL.2 SJ1.2
N$23: EPD_C2.2 J1.4
N$25: EPD_C1.2 J1.5
N$26: EPD_C6.2 J1.18
N$27: EPD_C7.2 J1.19
N$28: EPD_C8.2 J1.20
N$29: EPD_C10.2 J1.22
N$30: EPD_C12.2 J1.24
N$31: C32.2 IC2.A2
N$32: J4.A5 R1_USB.2
N$33: J4.B5 R2_USB.1
OUT: IC2.C3
OUT+ [POWER]: IC2.A3 TP_OP.TP
OUT- [POWER]: TP_ON.TP
P0.00/XL1: C17.2 U1.P$D2 X2.1
P0.01/XL2: C18.2 U1.P$F2 X2.2
P0.04: U1.P$J1
P0.09: U1.P$L24
P0.13/1.5D: C30.2 R5.1 SW_UP.2
P0.14/1.5D: C31.2 R8.1 SW_ENT.2
P0.26: U1.P$G1
P0.27: U1.P$H2
P0.28: U1.P$B11
P0.29: U1.P$A10
P0.30: U1.P$B9
P0.31: U1.P$A8
P1.01/1.6C: Q1.1 R_PWR_EPD.1
P1.01/2.4B: U1.P$Y23
P1.02/1.6C: C29.2 R7.1 SW_DN.2
P1.02/2.8C: U1.P$W24
P1.03: U1.P$V23
P1.04: U1.P$U24
P1.05: U1.P$T23
P1.06: U1.P$R24
P1.07: U1.P$P23
P1.09: U1.P$R1
P1.10: U1.P$A20
P1.11: U1.P$B19
P1.12: U1.P$B17
P1.13: U1.P$A16
P1.14: U1.P$B15
P1.15: U1.P$A14
PMIC_INT: IC1.A1 U1.P$T2
PO.13/2.6C: U1.P$AD8
PO.14/2.7C: U1.P$AC9
PO.19: U1.P$AC15
PO.20: U1.P$AD16
PO.21: U1.P$AC17
PO.22: U1.P$AC19
PO.24: U1.P$AD20
PO.25: U1.P$AC21
PREVGH [POWER]: D5.1 EPD_C9.2 J1.21
PREVGL [POWER]: D2.2 EPD_C11.2 J1.23
RESE: J1.3 Q3.2 R1_EP_DR.2
RESET: J2.6 TP_RESET.TP U1.P$AC13
RF: ANT1.1 C4.1 C22.1 L1.2
SCK/1.5B: J1.13
SCK/2.2D: U1.P$A12
SCL/1.4C: IC2.C1
SCL/2.4C: IC1.B1 R4.1 R17.2 TP_SCL.TP U1.P$M2 U3.7
SDA/1.4C: IC2.B2
SDA/2.4C: IC1.C1 IC3.2 R2.1 R18.2 TP_SDA.TP U1.P$L1 U3.8
SWDCLK: J2.4 TP_SWDCLK.TP U1.P$AA24
SWDIO: J2.2 TP_SWDIO.TP U1.P$AC24
SWO: TP_SWO.TP U1.P$AD22
VBAT/1.2A [POWER]: C27.2 TP_VBAT.TP U3.2 U3.3
VBAT/2.5C [POWER]: C37.2 IC1.C2
VBUS/1.5D [POWER]: C42.1 C43.1 D3.5 J4.A4_B9 J4.A9_B4
VBUS/2.6D [POWER]: C21.1 C38.2 IC1.A2 U1.P$AD2
VREG [POWER]: C23.2 C24.2 C39.1 IC1.B2 IC9.A1 IC9.A2 IC9.A3 TP_VREG.TP

## Tracks (layer width: path | path; a pad name or v marks a point on that pad's centre or on a via)
3V3/1.7D  (via drill 0.15, 0.15 pad 0.15, 0.35)
  Top 0.3: v43.04,11.33 42.81,11.56 42.81,11.63 IC2.C2 | 44.26,9.19 v43.73,9.73 | 44.26,9.19 C34.2 | v33.1,9.8 33.33,9.57 33.33,9.1 34.85,7.57 Q1.2 35.04,7.52 36.87,7.52 38.2,6.19 38.2,5.2 37.9,4.9 v37.8,4.9 | 44.26,9.19 41.16,6.1 41.16,5.76 v40.9,5.5
  Route2 0.3: R_PWR_EPD.2 33.65,10.3 33.2,10.3 33.1,10.2 v33.1,9.8 | v37.8,4.9 40.2,4.9 40.8,5.5 v40.9,5.5
  Bottom 0.3: v43.04,11.33 43.04,10.41 v43.73,9.73
  other vias: 33.75,10.4
3V3/1.7D1  (via drill 0.15)
  Top 0.3: v12.48,6.07 12.03,6.07 R5.2 | v22.09,6.07 22.92,6.07 23.08,6.22 R8.2 | v33.52,6.15 34.05,6.15 R7.2
  Bottom 0.3: v12.48,6.07 v22.09,6.07 22.16,6.15 v33.52,6.15
3V3/2.4A  (via drill 0.15)
  Top 0.15: 19.72,13.54 19.95,13.54 U1.P$Y2 | 19.5,13.77 19.72,13.54 | IC9.E2 IC9.E3 44.06,19.1 v44.11,19.1 | 19.72,13.54 19.72,13.43 v19.52,13.23
  Top 0.3: v37.1,32.36 37.1,31.83 IC3.3 | v38.01,33.27 37.86,33.43 37.71,33.43 | 37.71,33.43 37.55,33.43 IC3.7 | 36.03,33.43 36.03,34.03 36.34,34.34 36.87,34.34 37.71,33.5 37.71,33.43 | 36.03,33.43 IC3.10 | 34.96,32.59 33.52,32.59 33.29,32.82 33.29,33.12 C19.1 | 34.96,32.59 35.8,33.43 36.03,33.43 | 37.94,23.52 39.99,25.58 39.99,30.84 TP_3.3V.TP 38.81,29.65 36.82,29.65 35.04,31.43 35.04,32.51 34.96,32.59 | 37.94,23.52 35.27,20.85 35.04,20.85 34.43,20.24 33.06,20.24 TP_3V3.TP | U1.P$AD23 25.52,12.24 v25.9,12.24 27.12,11.02 C8.1 | U1.P$W1 19.5,13.77 | v23.15,11.86 23,12.01 23,12.24 U1.P$AD14 | v44.11,18.34 44.11,17.12 43.95,16.97 C33.1 43.8,16.89 43.19,16.28 42.2,16.28 C25.1 | v33.21,24.66 32.83,24.28 32.68,24.28 J2.1 | v38.01,23.44 37.94,23.52 | v18.21,14.35 18.09,14.35 17.48,13.75 C6.1 | C7.1 22.38,11.29 v22.37,11.28
  Bottom 0.15: 20.33,13.31 19.6,13.31 | 19.6,13.31 19.57,13.31 | 19.6,13.31 v19.52,13.23 | 18.48,14.25 18.32,14.25 v18.21,14.35
  Bottom 0.3: v38.01,33.27 v37.1,32.36 | v22.37,11.27 20.33,13.31 | 25.67,12.24 23.53,12.24 v23.15,11.86 23.15,11.4 22.7,10.95 v22.37,11.27 | 25.67,12.24 v25.9,12.24 | v44.11,18.34 v44.11,19.1 44.03,19.18 42.18,19.18 41.87,19.48 41.87,19.74 38.09,23.52 | 38.09,23.52 36.79,24.82 36.11,24.82 35.95,24.66 v33.21,24.66 32.52,23.98 30.7,23.98 26.53,19.82 25.91,19.82 25.52,19.42 25.52,15.21 25.67,15.06 25.67,12.24 | v38.01,23.44 38.09,23.52 | 19.57,13.31 19.42,13.31 18.48,14.25 | v22.37,11.28 v22.37,11.27
DEC1
  Top 0.152: U1.P$C1 19.42,17.8 18.2,17.8 17.44,18.57 17.44,18.8 C5.1
DEC4_6  (via drill 0.15)
  Top 0.152: v26.05,17.73 26.05,17.35 U1.P$E24 | C10.1 28.18,19.02 28.18,19.25 v28.49,19.56 28.41,19.56 28.41,20.17 26.73,21.84 26.12,21.84 25.9,22.07 25.9,22.3 C16.1 | U1.P$B5 20.71,18.34 20.71,23.14 21.78,24.21 23.15,24.21 24.52,22.83 L3.2 24.6,22.83 25.06,22.38 25.74,22.38 | 25.74,22.38 25.82,22.38 C16.1 | 25.74,22.38 25.74,23.82 C15.1 | 25.74,22.38 C16.1
  Bottom 0.152: v26.05,17.73 26.05,18.11 26,18.16 26,18.51 27.05,19.56 v28.49,19.56
DN
  Top 0.152: J4.A7 22.77,28.93 22.77,28.4 23,28.17 23.53,28.17 23.69,28.32 23.69,28.93 J4.B7 23.69,29.01 23.69,29.62 22.09,31.22 18.2,31.22 18.05,31.06 12.64,31.06 11.72,30.15 11.72,29.84 D3.1
DP
  Top 0.152: 22.35,29.65 22.54,29.84 23,29.84 23.23,29.62 23.23,29.01 J4.A6 | 22.35,29.65 22.31,29.62 22.31,29.01 J4.B6 | 22.35,29.65 21.09,30.91 18.35,30.91 17.29,29.84 13.63,29.84 D3.3
EPD_3V3  (via drill 0.15)
  Top 0.3: v13.63,25.04 13.17,25.04 EPD_C5.2 | v11.34,19.41 11.34,16.51 11.11,16.28 10.66,16.28 J1.15 10.66,16.13 10.66,15.82 J1.16 | 9.05,8.13 9.05,8.81 L5.1 9.05,8.97 v9.05,13 | 9.05,8.13 9.05,7.52 C1-EP-DR.1 | 9.05,8.13 10.66,8.13 11.34,7.44 15.38,7.44 17.97,4.85 20.03,4.85 20.26,5.08 20.26,7.19 21.54,8.47 21.54,9.62 21.87,9.95 22.78,9.95 24.83,7.9 26.28,7.9 29.78,11.4 34.05,11.4 34.9,10.55 34.9,9.9 34.67,9.67 Q1.3
  Bottom 0.3: v13.63,25.04 10.96,22.38 10.96,19.79 v11.34,19.41 11.27,19.33 11.27,17.27 9.05,15.06 v9.05,13
GDR  (via drill 0.15)
  Top 0.3: Q3.1 27.57,5.77 26.28,5.77 23.91,8.13 23.15,8.13 R2_EP_DR.2 23.08,8.13 v22.77,7.82 | v11.42,22.15 11.42,22.45 11.11,22.76 10.66,22.76 J1.2
  Bottom 0.3: v11.42,22.15 12.03,22.15 13.02,23.14 13.47,23.14 15.82,20.8 15.82,13.33 16.45,12.7 17.89,12.7 v22.77,7.82
GND  (via drill 0.15, 0.35)
  Top 0.15: 43.42,20.17 43.77,20.17 IC9.C3
  Top 0.152: 27.53,19.14 28.03,19.63 28.03,19.79 C12.2 28.03,19.86 28.03,20.09 27.27,20.85 v26.89,20.85 | 27.53,19.14 27.42,19.02 C11.2 | 27.53,19.14 26.81,19.86 C13.2 | 22.85,11.4 22.85,11.56 22.54,11.86 21.78,11.86 21.48,11.56 C21.2 21.4,11.48 21.36,11.44 | 21.36,11.44 20.87,10.95 20.1,10.95 18.58,12.47 18.58,12.62 C20.2 18.5,12.7 18.5,13.69 C6.2 18.5,13.77 19.03,14.29 v19.03,14.38 | U1.P$F23 25.44,17.04 24.83,17.04 24.6,17.27 U1.P$74 | 21.17,18.26 21.17,17.58 20.94,17.35 | 21.17,18.26 U1.P$B7 | C14.2 21.17,19.48 21.17,18.95 21.09,18.87 21.09,18.26 21.17,18.26 | U1.P$74 20.94,14.91 20.94,13.77 U1.P$87 21.02,13.77 22.09,13.77 U1.P$88 | U1.P$83 20.94,14.98 U1.P$74 | U1.P$79 20.94,16.2 21.48,16.74 U1.P$74 | U1.P$84 22.16,14.98 22.16,15.29 U1.P$74 | U1.P$80 22.16,16.13 U1.P$74 | U1.P$74 23.38,14.91 23.38,13.77 U1.P$89 23.46,13.77 24.52,13.77 U1.P$90 | U1.P$74 23.38,14.98 U1.P$85 23.46,14.98 24.52,14.98 U1.P$86 | U1.P$81 23.38,16.13 U1.P$74 | U1.P$82 24.52,16.2 23.99,16.74 U1.P$74 | 20.94,17.35 U1.P$75 | 20.94,17.35 U1.P$74 | U1.P$76 22.09,17.27 21.55,16.74 U1.P$74 | U1.P$78 24.6,17.35 U1.P$74 | U1.P$77 23.38,17.27 23.91,16.74 U1.P$74 | C8.2 27.65,11.02 27.65,12.01 C9.2 27.57,12.09 27.57,13.08 27.27,13.38 27.27,13.54 C3.2 27.19,13.61 27.19,15.14 | X1.2 28.49,17.73 28.49,17.58 27.42,16.51 27.42,16.36 X1.4 27.34,16.28 27.19,16.13 27.19,15.14 | 32.64,13.73 32.98,14.07 33.44,14.07 | 32.64,13.73 32.45,13.54 C4.2 | 33.44,14.07 33.74,14.07 34.28,13.54 C22.2 | C2.2 30.32,15.67 30.32,18.11 C1.2 30.32,18.19 30.32,18.34 29.71,18.95 28.87,18.95 | 28.87,18.95 28.71,18.95 C10.2 | 27.53,21.5 28.87,20.17 28.87,18.95
  Top 0.152: 27.53,21.5 26.66,22.38 26.43,22.38 C16.2 26.35,22.38 26.35,23.52 26.66,23.82 C15.2 26.66,23.9 26.05,24.51 17.67,24.51 | 32.64,13.73 30.7,15.67 30.39,15.67 C2.2 | 27.19,15.14 30.01,15.14 30.24,15.37 30.24,15.6 C2.2 | 27.53,21.5 v27.65,21.62 | v33.9,5.38 33.9,5 C29.1 | v34.66,5.08 35.34,4.39 35.34,4.01 SW_DN.1 35.42,3.94 35.95,3.94 | v22.7,5.61 22.7,5.16 C31.1 | 24.37,4.93 24.37,4.01 SW_ENT.1 | 24.37,4.93 24.37,6.22 23.3,7.29 22.7,7.29 22.39,7.59 22.39,8.13 22.85,8.59 22.92,8.59 23.08,8.74 R2_EP_DR.1 23.05,8.74 22.42,9.38 v22.1,9.38 | 30.12,5.65 29.25,6.53 28.56,6.53 28.11,6.07 28.11,5.16 27.88,4.93 27.04,4.93 | 30.12,5.65 30.47,5.31 30.47,1.96 R_TYPE_SEL.1 | 24.37,4.93 27.04,4.93 | 27.04,4.93 27.04,1.35 SJ1.1 | v30.09,5.61 30.12,5.65 | 41.75,10.95 41.75,10.11 C32.1 41.75,9.96 41.9,9.96 42.2,9.65 42.2,9.27 41.97,9.04 41.52,9.04 40.98,9.57 40.98,12.39 41.94,13.35 | 41.75,10.95 41.75,11.71 42.2,12.17 42.28,12.17 IC2.B1 | 41.75,10.95 43.27,10.95 43.65,11.33 43.65,11.86 43.34,12.17 IC2.B3 | 44.56,13.38 44.56,16.59 44.87,16.89 C33.2 | 44.56,13.38 44.56,9.8 C34.1 44.64,9.8 | 41.94,13.35 41.97,13.38 44.56,13.38 | R3.1 39.61,33.81 41.28,32.14 41.28,30.38 40.98,30.08 40.98,27.63 C38.1 40.98,27.56 40.98,21.54 38.62,19.18 C24.1 38.7,19.02 39,18.72 39,17.5 C23.1 39,17.42 | 38.16,15.6 37.17,15.6 36.95,15.82 36.56,15.82 U3.6 36.49,15.9 35.5,15.9 | 38.16,15.6 C27.1 | 35.5,15.9 34.96,15.37 U3.4 | 35.5,15.9 35.5,16.05 U3.9 | U3.9 35.5,16.13 35.5,16.28 34.96,16.81 34.58,16.81 U3.1 34.51,16.81 34.2,16.81 33.44,16.05 33.44,14.07 | 35.5,15.9 U3.9 | 43.04,20.17 43.34,20.17 IC9.C2 43.42,20.17
  Top 0.152: 43.04,20.17 IC9.C1 42.96,20.24 42.96,20.56 IC9.B1 | 41.63,17.77 41.59,17.8 41.06,17.8 41.06,16.51 41.9,15.67 41.9,13.38 41.94,13.35 | 41.63,17.77 42.43,16.97 42.58,16.97 C25.2 | 38.16,16.59 38.16,15.6 | R2_USB.2 28.87,31.37 28.87,31.14 27.34,29.62 J4.SH3 27.27,29.54 26.73,29.01 26.2,29.01 J4.A1_B12 | C37.1 45.02,27.48 44.72,27.48 44.34,27.86 R9.1 44.26,27.86 43.34,27.86 | 43.34,27.86 43.34,27.63 C39.2 43.34,27.86 | 43.34,27.86 43.34,28.02 43.04,28.32 43.04,29.23 43.08,29.28 | 43.08,29.28 IC1.D2 | J2.3 33.9,24.28 35.12,24.28 J2.5 35.19,24.28 35.65,24.28 36.41,25.04 36.72,25.04 37.25,25.58 37.25,28.24 32.83,32.66 32.83,33.65 | IC3.8 37.02,33.43 36.56,33.43 IC3.9 36.56,33.5 v36.56,33.88 | 32.83,33.65 27.34,33.65 J4.SH1 27.27,33.73 18.73,33.73 J4.SH2 | 32.83,33.65 33.52,33.65 33.74,33.43 33.74,33.2 C19.2 | C18.1 14.01,14.83 14.01,16.43 C17.1 14.01,16.51 14.01,16.66 14.88,17.54 | 17.63,19.29 17.59,19.33 16.68,19.33 14.88,17.54 | 17.63,19.29 17.82,19.1 17.82,18.87 C5.2 | 12.71,18.34 12.71,18.87 EPD_C11.1 12.71,18.95 12.71,19.94 EPD_C10.1 | 12.71,18.34 12.71,17.8 EPD_C12.1 12.64,17.8 12.56,17.8 12.1,17.35 12.1,16.36 11.04,15.29 10.66,15.29 J1.17 | EPD_C10.1 12.71,20.02 12.71,21 EPD_C9.1 12.79,21.08 12.79,22.07 EPD_C8.1 12.79,22.15 12.79,23.14 EPD_C7.1 12.79,23.21 12.79,24.13 EPD_C6.1 12.71,24.21 12.64,24.28 12.64,25.04 EPD_C5.1 12.71,25.04 12.71,26.03 EPD_C1.1 12.71,26.11 12.71,27.18 EPD_C2.1 | J1.8 10.66,19.79 12.41,19.79 12.64,20.02 EPD_C10.1 | 14.88,17.54 14.09,18.34 12.71,18.34 | J4.A12_B1 19.8,29.01 19.27,29.01 18.73,29.54 J4.SH4 18.66,29.54 17.67,29.54
  Top 0.152: v11.65,27.79 10.73,26.87 TP_BAT_GND.TP | 12.83,5.27 13.4,4.7 13.4,4.01 SW_UP.1 | 12.83,5.27 12.71,5.38 11.88,5.38 11.65,5.16 11.65,5 C30.1 | 12.83,6.34 12.87,6.3 12.87,5.31 12.83,5.27 | 12.83,6.34 12.18,6.98 11.19,6.98 10.73,7.44 10.05,7.44 C1-EP-DR.2 9.97,7.44 9.44,6.91 8.75,6.91 7.99,7.67 7.99,10.95 J1.MP2 7.99,11.02 7.99,23.98 J1.MP1 7.91,24.05 | 12.83,6.34 13.4,6.91 14.77,6.91 15.76,5.92 15.76,5.61 D4.1 | 11.11,31.37 9.05,31.37 8.37,30.68 C43.2 8.29,30.61 8.14,30.61 7.61,30.07 | 11.11,31.37 13.93,31.37 14.69,32.13 16.98,32.13 R1_USB.1 | 11.11,31.37 11.11,29.08 11.27,28.93 12.1,28.93 12.64,29.46 12.64,29.77 D3.2 12.64,29.39 13.09,28.93 14.01,28.93 14.62,29.54 17.67,29.54 | 3.8,28.17 2.73,27.1 TP_GND.TP | C42.2 | 17.67,29.54 17.67,24.51 | 17.67,24.51 17.67,19.33 17.63,19.29 | 43.8,30.76 v43.76,30.8 | 43.8,29.99 43.66,29.85 43.66,29.48 43.44,29.26 43.12,29.26 43.11,29.28 43.08,29.28 | 43.04,20.17 42.28,20.17 41.94,19.83 41.94,18.08 41.63,17.77 | v21.92,10.82 21.36,11.37 21.36,11.44
  Route15 0.152: v21.92,10.82 22.1,10.63 v22.1,9.38
  Bottom 0.152: U1.P$77 23.3,17.35 23.23,17.42 23.23,19.48 24.6,20.85 v26.89,20.85 v27.65,21.62 | v34.66,5.08 34.35,5.38 v33.9,5.38 33.67,5.61 v30.09,5.61 v22.7,5.61 | J4.SH3 27.34,29.62 27.34,33.65 J4.SH1 27.34,33.73 27.5,33.88 v36.56,33.88 40.68,33.88 v43.76,30.8 | J4.SH2 18.66,33.65 18.66,29.62 J4.SH4 18.58,29.62 16.75,27.79 v11.65,27.79 | U1.P$83 20.93,14.93 20.15,14.15 19.83,14.15 19.61,14.38 v19.03,14.38
  other vias: 6.3,27.2 3.7,8.2 25.4,5.2 30.9,9.7 43.7,6.8 38.7,11.4 41,23.4 32,31.6 6.3,33.7 19.5,25.5 27.3,26.6 18.5,21.7 24.5,26.3 42.5,5.8 37.1,18.4
  pour Top (isolate 0.15): 36.98,5.97 36.98,1.75 37.4,6.4
  pour Top (isolate 0.15): 201 corners
  pour Bottom: 14.96,1.34 14.98,1.32 14.98,-0.02 20.37,-0.02 20.52,0.13 20.52,1.62 20.54,1.64 20.76,1.86 20.78,1.88 25.32,1.88 25.34,1.86 25.56,1.64 25.58,1.62 25.58,0.07 25.58,0.08 31.47,0.08 31.72,0.33 31.72,1.72 31.74,1.74 31.76,1.76 31.78,1.78 36.47,1.78 37.32,2.63 37.32,5.42 37.34,5.44 37.36,5.46 37.38,5.48 44.47,5.48 45.72,6.73 45.72,30.57 41.77,34.52 41.61,34.52 41.61,34.52 41.6,34.52 41.58,34.52 41.58,34.52 5.63,34.82 1.48,30.67 1.48,6.23 7.33,0.38 8.97,0.38 10.36,1.76 10.38,1.78 14.52,1.78 14.54,1.76
  pour Route2: 9.68,1.58 14.27,1.58 14.46,1.76 14.48,1.78 14.52,1.78 14.54,1.76 14.56,1.74 14.58,1.72 14.58,0.23 14.93,-0.12 20.72,-0.12 20.72,1.62 20.74,1.64 20.76,1.66 20.78,1.68 25.07,1.68 25.26,1.86 25.28,1.88 25.32,1.88 25.34,1.86 25.36,1.84 25.38,1.82 25.38,0.1 25.38,0.08 25.38,0.08 25.38,0.08 25.37,0.08 31.67,0.08 31.92,0.33 31.92,1.87 31.84,1.96 31.82,1.98 31.82,2.02 31.84,2.04 31.86,2.06 31.88,2.08 36.02,2.08 36.04,2.06 36.9,1.21 37.22,1.53 37.22,4.82 37.24,4.84 37.26,4.86 37.28,4.88 43.67,4.88 45.82,7.03 45.82,30.57 42.07,34.32 41.6,34.32 5.33,34.22 1.78,30.67 1.78,6.23 7.53,0.48 8.87,0.48 9.62,1.23 9.62,1.52 9.64,1.54 9.66,1.56
IMU_INT1  (via drill 0.15)
  Top 0.152: IC3.5 37.63,32.28 37.78,32.28 37.94,32.13 37.94,31.45 37.13,30.64 v37.13,30.41 | U1.P$N1 19.03,15.28 v19.02,15.27
  Bottom 0.152: v37.13,30.41 35.3,30.41 32.98,28.09 32.98,26.95 31.91,25.88 28.56,25.88 20.09,17.41 19.83,17.41 19.47,17.04 19.47,15.61 19.13,15.27 v19.02,15.27
IMU_INT2  (via drill 0.15 pad 0.15)
  Top 0.13: IC3.6 38.45,32.85 38.7,32.6 v38.7,32.5
  Route15 0.13: v38.7,32.5 35.3,29.1 28.4,29.1 24.9,25.6 24.9,25.3 | U1.P$P2 19.43,15.03 19.4,15 19.4,13.63 19.15,13.38 19.15,11.05 19,10.9 15.4,10.9 12.7,13.6 12.7,16.2 18.02,21.52 18.02,21.9 18.3,22.18 21.78,22.18 22.6,23
  Route15 0.15: 24.9,25.3 22.6,23
  other vias: 19.99,15.03
LX1  (via drill 0.15 pad 0.15)
  Top 0.13: IC9.B2 IC9.B3 43.86,20.5 43.91,20.5 44.04,20.38 v44.16,20.38
  Top 0.3: v42.4,23.5 42.4,24.38 L7.1
  Route15 0.13: v44.16,20.38 44.16,21.74 43.2,22.7
  Route15 0.152: 43.2,22.7 v42.4,23.5
LX2  (via drill 0.15 pad 0.15)
  Top 0.15: IC9.D2 IC9.D3 43.84,19.84 43.92,19.84 44.08,20 44.32,20 44.6,20.29 44.6,20.6
  Top 0.3: v45.1,23.3 45.1,24.8 L7.2 | 44.6,20.6 44.53,20.67 v44.53,21.7
  Route2 0.3: v45.1,23.3 45.1,22.4 44.53,21.83 v44.53,21.7
N$1
  Top 0.152: U1.P$D23 25.52,17.58 25.52,18.34 26.12,18.95 26.81,18.95 C11.1
N$2  (via drill 0.15)
  Top 0.152: v25.97,16.74 25.82,16.59 25.52,16.59 U1.P$H23 | v26.43,14.91 26.43,13.84 26.66,13.61 C3.1 | v27.57,14.68 28.56,13.69 L1.1
  Bottom 0.152: v25.97,16.74 25.97,15.37 v26.43,14.91 27.34,14.91 v27.57,14.68
N$4  (via drill 0.15)
  Top 0.152: v29.17,16.97 28.56,16.36 X1.1 | v29.93,17.58 29.86,17.65 29.86,18.11 C1.1 | v26.43,18.4 26.3,18.28 U1.P$B24
  Bottom 0.152: v29.93,17.58 29.71,17.58 29.17,17.04 v29.17,16.97 27.66,18.48 26.64,18.48 26.57,18.4 v26.43,18.4
N$5  (via drill 0.15 pad 0.15)
  Top 0.13: U1.P$A23 25.49,18.99 25.86,19.36 v26.1,19.36 | v26.55,17.95 27.25,17.95 27.37,17.83
  Top 0.152: C2.1 29.71,15.67 29.71,17.2 29.17,17.73 29.17,18.34 29.02,18.49 28.03,18.49 27.37,17.83 27.34,17.8 X1.3
  Route2 0.13: v26.55,17.95 26.84,18.24 26.84,18.62 v26.1,19.36
N$6  (via drill 0.15)
  Top 0.152: v20.26,12.7 20.33,12.78 20.71,12.78 U1.P$AC5 | C20.1 17.51,12.7 16.9,13.31 16.9,13.61 v16.72,13.8
  Bottom 0.152: v20.26,12.7 19.19,12.7 18.32,13.57 16.95,13.57 v16.72,13.8
N$8  (via drill 0.15)
  Top 0.152: v26.81,14.15 26.81,15.14 26.66,15.29 26.05,15.29 U1.P$N24 | v27.04,13 27.04,12.17 27.12,12.09 C9.1
  Route2 0.152: v26.81,14.15 26.81,13.38 27.04,13.16 v27.04,13
N$9
  Top 0.152: U1.P$B1 19.42,18.34 19.42,19.1 19.8,19.48 20.18,19.48 C14.1
N$10  (via drill 0.15)
  Top 0.152: v19.8,18.87 20.18,18.49 20.18,18.34 U1.P$B3 | v21.09,20.17 22.39,20.17 22.47,20.24 L2.1
  Bottom 0.152: v21.09,20.17 v19.8,18.87
N$12
  Top 0.152: L3.1 22.47,22.76 22.47,22.45 24.6,20.32 L2.2
N$13  (via drill 0.15)
  Top 0.152: v23.61,19.25 23.61,19.18 23.91,18.87 23.91,18.8 U1.P$A18 | C13.1 26.2,19.94 26.12,20.02 25.9,20.02 v25.47,20.44
  Bottom 0.152: v23.61,19.25 24.28,19.25 v25.47,20.44
N$14  (via drill 0.15)
  Top 0.152: v25.06,18.34 25.06,18.72 U1.P$A22 | v26.5,20.47 26.89,20.47 27.5,19.86 C12.1
  Bottom 0.152: v26.5,20.47 26.23,20.19 25.76,20.19 25.06,19.5 v25.06,18.34
N$15
  Top 0.152: IC3.1 36.11,31.75 36.11,30.9 36.97,30.03 37.29,30.03 39.53,32.28 39.53,33.12 R3.2
N$16  (via drill 0.15)
  Top 0.152: R4.2 45.48,20.55 44.63,19.7 44.4,19.7 v44.33,19.62 | IC9.D1 42.43,19.78 v42.32,19.67
  Bottom 0.152: v44.33,19.62 44.28,19.67 v42.32,19.67
N$17
  Top 0.152: IC9.E1 42.96,19.33 42.96,19.18 43.42,18.72 44.87,18.72 45.48,19.33 R2.2
N$18
  Top 0.152: R18.1 39.92,13.77 40.14,14 40.22,14 40.37,14.15 40.37,14.6 39.99,14.98 R17.1
N$19
  Top 0.152: IC1.D1 42.58,28.59 42.58,28.32 42.89,28.02 42.89,27.18 43.04,27.02 44.03,27.02 44.26,27.25 R9.2
N$20  (via drill 0.15)
  Top 0.152: L5.2 10.12,8.81 11.57,8.81 12.56,7.82 13.32,7.82 13.86,8.36 C2-EP-DR.2 13.93,8.36 v14.85,8.36 | v27.65,7.82 28.18,7.82 Q3.3 | v21.63,6.83 21.63,6.68 20.64,5.69 20.64,3.55 19.34,2.26 19.34,1.88 D5.2
  Bottom 0.152: v27.65,7.82 24.3,7.82 23.3,6.83 v21.63,6.83 20.1,8.36 v14.85,8.36
N$21
  Top 0.152: C2-EP-DR.1 12.94,8.43 13.55,9.04 15.76,9.04 D2.1 15.84,9.04 19.27,5.61 D4.2
N$22
  Top 0.152: R_TYPE_SEL.2 30.47,1.35 28.56,1.35 SJ1.2 28.56,1.42 28.56,1.5 27.8,2.26 27.8,4.32 27.95,4.47 28.03,4.47 28.18,4.62 R1_EP_DR.1
N$23  (via drill 0.15)
  Top 0.152: v14.31,27.18 13.78,27.18 EPD_C2.2 | v12.18,25.04 12.18,24.89 11.8,24.51 11.8,21.92 11.65,21.77 10.66,21.77 J1.4
  Bottom 0.152: v12.18,25.04 v14.31,27.18
N$25  (via drill 0.15)
  Top 0.152: v13.93,25.43 13.78,25.58 13.78,26.03 EPD_C1.2 | v12.18,24.28 12.18,21.84 11.65,21.31 10.66,21.31 J1.5
  Bottom 0.152: v13.93,25.43 13.32,25.43 v12.18,24.28
N$26
  Top 0.152: EPD_C6.2 13.78,24.21 13.78,24.59 14.31,25.12 14.31,26.41 14.09,26.64 13.4,26.64 13.25,26.8 13.25,27.56 13.02,27.79 12.41,27.79 11.95,27.33 11.95,25.43 9.59,23.06 9.59,15.44 10.28,14.76 10.58,14.76 J1.18
N$27  (via drill 0.15)
  Top 0.152: v13.25,22.68 13.7,23.14 EPD_C7.2 | v12.48,17.12 12.48,15.75 11.04,14.3 10.66,14.3 J1.19
  Bottom 0.152: v13.25,22.68 13.25,20.02 13.63,19.63 13.63,18.26 v12.48,17.12
N$28  (via drill 0.15)
  Top 0.152: v14.31,21.54 13.78,22.07 EPD_C8.2 | v13.17,17.2 13.17,15.9 11.04,13.77 10.66,13.77 J1.20
  Bottom 0.152: v14.31,21.54 14.31,18.34 v13.17,17.2
N$29
  Top 0.152: EPD_C10.2 13.78,20.02 14.54,20.02 15.07,20.55 15.07,27.02 13.93,28.17 10.2,28.17 9.28,27.25 9.28,13.38 9.89,12.78 10.58,12.78 J1.22
N$30
  Top 0.152: EPD_C12.2 13.7,17.73 13.7,16.89 13.55,16.74 13.55,14.6 14.09,14.07 14.85,14.07 15.76,13.16 15.76,11.71 15.53,11.48 10.88,11.48 10.66,11.71 J1.24
N$31
  Top 0.152: IC2.A2 42.74,12.78 42.43,13.08 42.13,13.08 41.29,12.24 41.29,9.8 41.67,9.42 C32.2
N$32
  Top 0.152: R1_USB.2 17.06,31.52 22.31,31.52 24.22,29.62 24.22,29.01 J4.A5
N$33
  Top 0.152: R2_USB.1 28.94,31.9 29.1,31.9 29.32,31.67 29.32,29.84 27.34,27.86 21.78,27.86 21.32,28.32 21.32,28.93 J4.B5
OUT+
  Top 0.3: IC2.A3 43.34,12.7 43.42,12.7 44.03,12.09 44.03,10.72 42.58,9.27 42.58,9.04 41.06,7.52 40.14,7.52 TP_OP.TP
P0.00/XL1
  Top 0.152: U1.P$D2 19.95,17.5 19.72,17.5 19.34,17.12 17.21,17.12 15.76,15.67 X2.1 15.68,15.67 14.92,16.43 14.54,16.43 C17.2
P0.01/XL2  (via drill 0.15 pad 0.15)
  Top 0.152: C18.2 14.62,14.76 14.85,14.76 15.12,14.48 16.68,14.48 17.81,15.61 X2.2 18.51,15.9 18.87,15.9 v19.05,15.72
  Route2 0.152: U1.P$F2 19.99,16.67 v19.05,15.72
  other vias: 19.99,17.03
P0.13/1.5D  (via drill 0.15)
  Top 0.152: v12.48,5 12.03,5 C30.2 | R5.1 11.95,6.6 11.49,6.15 v11.49,5.99 10.66,5.16 10.66,4.01 SW_UP.2
  Bottom 0.152: v11.49,5.99 v12.48,5
P0.14/1.5D
  Top 0.152: C31.2 23.08,5.16 23.08,5.61 23.53,6.07 23.53,6.53 23.15,6.91 R8.1 23.08,6.83 22.24,6.83 21.63,6.22 21.63,4.01 SW_ENT.2
P1.01/1.6C
  Top 0.152: Q1.1 33.08,8.81 32.32,9.57 32.32,9.78 33.49,10.95 R_PWR_EPD.1
P1.02/1.6C
  Top 0.152: 34.28,5.69 34.28,5.77 34.51,5.99 34.51,6.38 34.12,6.76 R7.1 | 34.28,5.69 34.28,5 C29.2 | 34.28,5.69 34.2,5.69 34.12,5.77 33.67,5.77 32.6,4.7 32.6,4.01 SW_DN.2
PMIC_INT  (via drill 0.15 pad 0.15)
  Top 0.13: IC1.A1 42.44,30.56 v42.11,30.89
  Route2 0.13: v42.11,30.89 40.16,28.94 30.72,28.94 30.68,28.9 27.9,28.9 12.9,13.9 15.7,11.1 18.01,11.1 20.32,13.41 20.32,14.18 19.99,14.51 U1.P$T2
  other vias: 19.99,14.53
PREVGH  (via drill 0.15)
  Top 0.3: v14.69,20.78 14.47,21 13.86,21 EPD_C9.2 | v9.97,13.31 10.12,13.31 10.2,13.23 10.58,13.23 J1.21 | v14.54,6.53 14.54,5.38 15.76,4.16 15.76,1.88 D5.1
  Bottom 0.3: v14.69,20.78 14.69,18.03 v9.97,13.31 10.43,12.85 10.43,12.09 14.54,7.97 v14.54,6.53
PREVGL  (via drill 0.15)
  Top 0.3: v13.25,19.41 13.7,18.95 EPD_C11.2 | 10.05,12.32 10.12,12.24 10.58,12.24 J1.23 | 10.05,12.32 v9.97,12.39 | D2.2 19.27,9.12 17.21,9.12 15.23,11.1 10.28,11.1 9.97,11.4 9.97,12.24 10.05,12.32
  Bottom 0.3: v13.25,19.41 13.25,18.57 9.51,14.83 9.51,12.85 v9.97,12.39
RESE  (via drill 0.15)
  Top 0.152: 28.87,4.85 28.87,5.69 Q3.2 | 28.87,4.85 28.87,4.62 28.49,4.24 28.41,4.24 R1_EP_DR.2 | v9.97,21.92 10.28,22.22 10.58,22.22 J1.3 | 28.87,4.85 v28.79,4.85
  Bottom 0.152: v9.97,21.92 9.97,16.59 8.67,15.29 8.67,9.42 12.1,5.99 12.1,5.84 12.56,5.38 22.31,5.38 22.99,4.71 25.6,4.71 25.75,4.85 v28.79,4.85
RESET  (via drill 0.15, 0.15 pad 0.15)
  Top 0.13: v24,9.8 24,10.55 TP_RESET.TP
  Top 0.152: v29.71,27.41 29.71,28.02 30.7,29.01 35.12,29.01 36.03,28.09 36.03,26.8 35.19,25.96 35.19,25.58 J2.6 | TP_RESET.TP 24.45,11.02 23.75,10.33 18.97,10.33 16.34,12.96 16.34,13.95 16.56,14.18 16.91,14.18 v16.95,14.21
  Route2 0.13: U1.P$AC13 22.74,10.56 23.6,9.7 23.9,9.7 v24,9.8
  Bottom 0.152: v29.71,27.41 28.49,26.19 28.41,26.19 19.94,17.71 19.71,17.71 16.95,14.95 v16.95,14.21
  other vias: 22.74,12.78
RF
  Top 0.152: L1.2 30.7,13.61 30.77,13.54 31.84,13.54 C4.1 31.91,13.46 31.91,13.23 32.14,13 32.6,13 33.06,13.46 33.21,13.46 C22.1 33.21,13.38 38.58,8.02 38.58,3.12 ANT1.1
SCL/2.4C  (via drill 0.15, 0.15 pad 0.15)
  Top 0.152: v41.52,14.53 40.68,15.37 39.69,15.37 39.46,15.14 39.46,14.76 39.76,14.45 39.92,14.45 R17.2 | v37.25,16.13 37.02,16.36 36.56,16.36 U3.7 | v41.9,29.16 41.9,29.27 41.75,29.42 41.75,29.73 42.1,30.09 42.41,30.09 IC1.B1 | TP_SCL.TP 14.38,12.78 15.23,11.94 v15.38,11.94 | v43.19,23.44 44.56,22.08 44.69,22.08 44.91,21.86 44.91,21.77 R4.1
  Route2 0.13: U1.P$M2 19.86,15.4 19.8,15.4 19.3,14.9 18.24,14.9 17.84,14.5 17.84,14.4 v15.38,11.94
  Bottom 0.152: v41.9,29.16 42.2,28.86 42.2,24.43 v43.19,23.44 44.56,22.08 44.69,22.08 45.02,21.74 45.02,18.19 41.52,14.68 v41.52,14.53 41.52,14.07 40.6,13.16 40.14,13.16 39.99,13.31 39.99,13.38 v37.25,16.13 37.25,16.05 33.21,12.01 28.03,12.01 23.15,7.14 22.39,7.14 17.67,11.86 15.46,11.86 v15.38,11.94
  other vias: 19.99,15.53
SDA/2.4C  (via drill 0.15, 0.15 pad 0.15)
  Top 0.152: v40.37,13.54 40.07,13.23 39.92,13.23 R18.2 | v37.78,16.2 37.17,16.81 36.56,16.81 U3.8 | v44.64,19.18 45.33,19.86 45.48,19.86 R2.1 | v16.52,15.82 17.51,16.81 18.81,16.81 19.16,16.46 19.16,16.14 19.47,15.84 19.47,15.8 U1.P$L1 | v13.63,13.92 13.32,13.92 12.18,12.78 TP_SDA.TP | v36.56,32.36 36.56,31.83 IC3.2 36.67,31.7 36.67,31.55 36.8,31.42 36.95,31.42 v37.03,31.35 | IC1.C1 42.36,29.76 42.17,29.57 v42.12,29.57
  Route2 0.152: v16.52,15.82 15.53,15.82 v13.63,13.92 | v37.03,31.35 42.18,31.35 42.49,31.04 42.49,29.94 v42.12,29.57
  Bottom 0.152: 40.14,13.77 37.78,16.13 v37.78,16.2 37.48,16.51 32.98,16.51 28.79,12.32 27.88,12.32 23,7.44 22.54,7.44 17.67,12.32 15.23,12.32 v13.63,13.92 | 40.14,13.77 v40.37,13.54 | v44.64,19.18 44.64,18.26 40.14,13.77 | v16.52,15.82 16.52,16.82 32.06,32.36 v36.56,32.36
SWDCLK  (via drill 0.15)
  Top 0.152: v26.5,13.08 26.35,13.23 26.05,13.23 U1.P$AA24 | v33.9,18.64 34.73,18.64 35.57,19.48 TP_SWDCLK.TP | v33.21,25.12 33.59,25.5 33.82,25.5 J2.4
  Route2 0.152: v33.21,25.12 33.06,25.12 32.83,24.89 32.83,22.76 32.98,22.61 32.98,19.56 v33.9,18.64
  Bottom 0.152: v26.5,13.08 27.72,14.3 29.55,14.3 v33.9,18.64
SWDIO  (via drill 0.15)
  Top 0.152: v26.58,12.62 26.35,12.62 26.2,12.78 26.05,12.78 U1.P$AC24 | v31.46,15.6 31.46,16.89 32.52,17.96 TP_SWDIO.TP 32.52,18.11 29.78,20.85 29.78,24.51 31,25.73 31.69,25.73 31.84,25.58 32.6,25.58 J2.2
  Bottom 0.152: v26.58,12.62 28.49,12.62 v31.46,15.6
SWO  (via drill 0.15)
  Top 0.152: v25.21,12.7 25.06,12.55 25.06,12.32 U1.P$AD22 | v25.67,11.79 25.67,11.4 25.74,11.33 25.74,9.27 TP_SWO.TP
  Route2 0.152: v25.21,12.7 25.21,12.24 v25.67,11.79
VBAT/1.2A
  Top 0.3: U3.2 34.58,15.9 U3.3 34.43,15.82 34.05,15.82 33.82,15.6 33.82,15.14 34.05,14.91 38.09,14.91 C27.2 38.24,14.91 38.24,14 38.55,13.69 TP_VBAT.TP
VBAT/2.5C  (via drill 0.15 pad 0.15)
  Top 0.15: 45.5,28.1 45.5,27.52 C37.2 | IC1.C2 42.91,29.76 42.96,29.72 43.2,29.72 v43.28,29.64
  Top 0.3: 45.5,28.1 44.8,28.1 44.04,28.86 v44.04,29.5
  Route2 0.15: v44.04,29.5 43.91,29.5 43.76,29.64 v43.28,29.64
VBUS/1.5D
  Top 0.13: 3.5,30.8 3.84,30.46 C42.1
  Top 0.3: 25.13,30.3 27.27,32.44 29.17,32.44 29.71,31.9 29.71,29.62 27.57,27.48 21.55,27.48 20.64,28.4 20.64,28.93 J4.A9_B4 | 25.13,30.3 25.13,29.74 25.2,29.68 25.2,29.17 J4.A4_B9 | 25.13,30.3 23.53,31.9 18.81,31.9 17.51,33.2 13.09,33.2 12.71,32.82 D3.5 12.64,32.36 12.64,32.74 12.18,33.2 9.82,33.2 7.68,31.06 7.68,30.99 7.38,30.68 C43.1 6.76,31.2 3.7,31.2 3.5,31 3.5,30.8
VBUS/2.6D  (via drill 0.15)
  Top 0.15: IC1.A2 43.32,30.56 v43.42,30.45
  Top 0.2: 41.44,27.63 C38.2
  Top 0.3: C21.1 20.03,11.94 20.03,12.24 U1.P$AD2 19.81,12.28 v19.77,12.23 | v41.67,27.94 41.44,27.71 41.44,27.63
  Bottom 0.15: v43.42,30.45 43.29,30.45 43.2,30.54 42.89,30.54 42.81,30.45 42.41,30.45
  Bottom 0.3: 41.67,29.62 41.67,29.57 41.45,29.35 41.45,28.97 41.67,28.75 v41.67,27.94 | 41.67,29.62 40.39,30.89 32.51,30.89 19.71,18.09 19.55,18.09 16.27,14.81 16.27,13.56 16.68,13.16 18.12,13.16 19.05,12.23 v19.77,12.23 | 41.67,29.62 41.67,29.76 42.36,30.45 42.41,30.45
VREG  (via drill 0.15 pad 0.15)
  Top 0.13: IC9.A3 IC9.A2 IC9.A1 42.91,20.91 42.61,20.91 40.8,19.1 39.69,19.1
  Top 0.15: 43.02,32.18 44.01,32.18 v44.16,32.03 | IC1.B2 v43.05,30.16
  Top 0.2: C23.2 39.44,18.89
  Top 0.3: 39.44,18.89 C24.2 39.69,19.1 41.59,21 41.97,21 41.97,23.29 41.95,23.31 41.95,27.07 42.36,27.48 C39.1 42.36,27.63 42.36,27.94 41.37,28.93 41.37,29.93 41.66,30.22 41.66,31.07 42.58,32 TP_VREG.TP 43.02,32.18
  Route2 0.15: 43.9,30.3 43.68,30.08 43.13,30.08 v43.05,30.16
  Route2 0.3: 43.9,30.3 44.28,30.68 44.28,31.88 44.17,32.03 v44.16,32.03